# EAGLE board Rocket-Control3 (EAGLE 7.6.0)
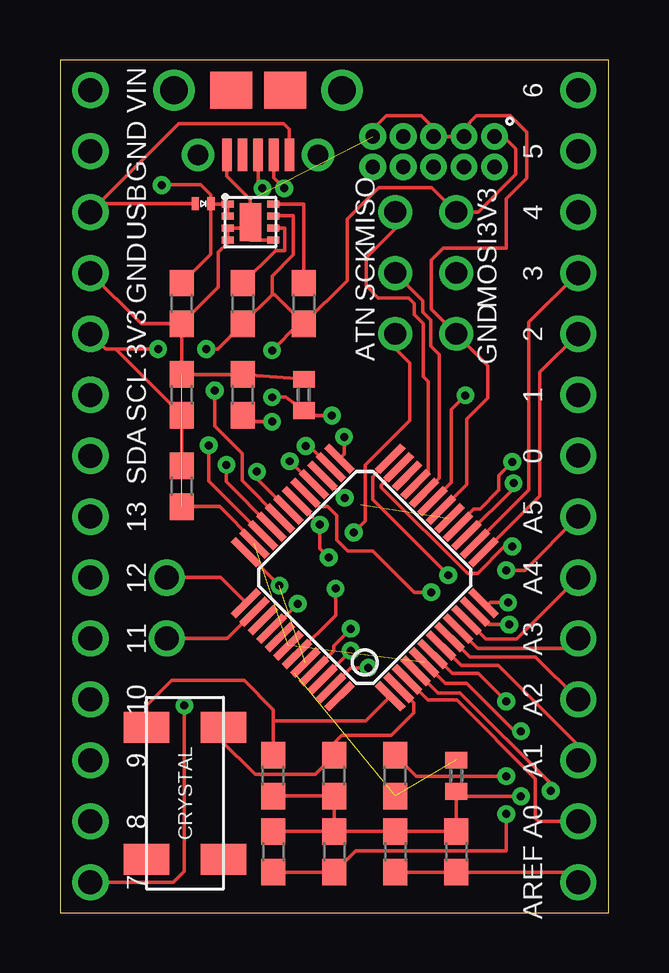
[diagram p0: board, top side]
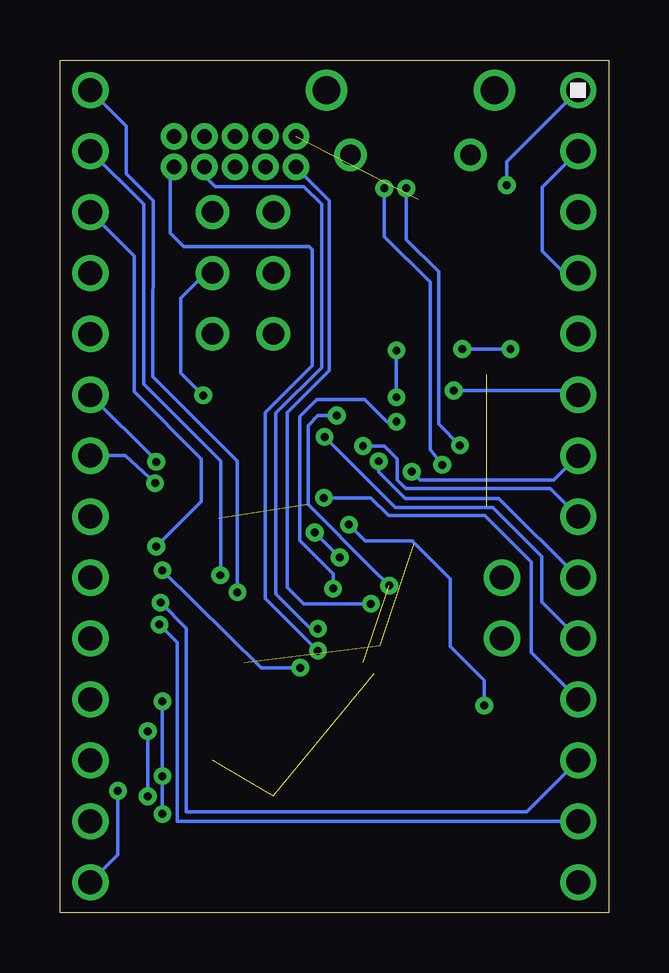
[diagram p1: board, bottom side, seen from below]

Size 22.86 x 35.55 mm. Coordinates in mm from the lower left corner, seen from the top.
Outline: 0,0 22.86,0 22.86,35.55 0,35.55 0,0
Copper layers (1*16): Top 0.035mm / dielectric 1.5mm / Bottom 0.035mm
Design rules "pcbway": minimum track width 6mil, minimum drill 12mil, track to track 6mil, track to pad 6mil, pad to pad 6mil, via to via 6mil, smd to smd 6mil, copper to edge 6mil, drill to drill 6mil, minimum pad ring 10mil, minimum via ring 8mil, stop-mask expansion 4mil, vias tented up to drill 0mil, thermal gap 10mil

## Footprints (pad centres in the part's own frame; a part is rotated, then mirrored left to right if it is on the bottom)
TQFP48 = smd 0.3 x 1.5: 1 -2.75,-4.25; 2 -2.25,-4.25; 3 -1.75,-4.25; 4 -1.25,-4.25; 5 -0.75,-4.25; 6 -0.25,-4.25; 7 0.25,-4.25; 8 0.75,-4.25; 9 1.25,-4.25; 10 1.75,-4.25; 11 2.25,-4.25; 12 2.75,-4.25; 25 2.75,4.25; 26 2.25,4.25; 27 1.75,4.25; 28 1.25,4.25; 29 0.75,4.25; 30 0.25,4.25; 31 -0.25,4.25; 32 -0.75,4.25; 33 -1.25,4.25; 34 -1.75,4.25; 35 -2.25,4.25; 36 -2.75,4.25 | smd 1.5 x 0.3: 13 4.25,-2.75; 14 4.25,-2.25; 15 4.25,-1.75; 16 4.25,-1.25; 17 4.25,-0.75; 18 4.25,-0.25; 19 4.25,0.25; 20 4.25,0.75; 21 4.25,1.25; 22 4.25,1.75; 23 4.25,2.25; 24 4.25,2.75; 37 -4.25,2.75; 38 -4.25,2.25; 39 -4.25,1.75; 40 -4.25,1.25; 41 -4.25,0.75; 42 -4.25,0.25; 43 -4.25,-0.25; 44 -4.25,-0.75; 45 -4.25,-1.25; 46 -4.25,-1.75; 47 -4.25,-2.25; 48 -4.25,-2.75
C0603 = smd 1.1 x 1: 1 -0.85,0; 2 0.85,0
4-SOJ:CRYSTAL = smd 1.3 x 1.9: 1:CRYSTAL -2.75,1.6; 2:CRYSTAL -2.75,-1.6; 3:N/C 2.75,1.6; 4:N/C 2.75,-1.6
8-WFDFN-EXPOSED-PAD = smd 0.28 x 0.5: AGND 1.5,0; EN 1,0; FB 1.5,1.9; PG 0,1.9; PGND 0,0; SW 0.5,1.9; VIN 0.5,0; VOS 1,1.9 | smd 1.6 x 0.9: EXPOSED-THERMAL-PAD 0.75,0.95
SOD-882 = smd 0.3 x 0.55: P$1 0,0; P$2 0.65,0
HEADER-HOLE = drill 1: P$1 0,0
HEADER-SIDE-A = drill 1: A0 0,-12.7; A1 0,-10.16; A2 0,-7.62; A3 0,-5.08; A4 0,-2.54; A5 0,0; AREF 0,-15.24; D0 0,2.54; D1 0,5.08; D2 0,7.62; D3 0,10.16; D4 0,12.7; D5 0,15.24; D6 0,17.78
HEADER-SIDE-B = drill 1: 3V3 -12.7,0; D7 -35.56,0; D8 -33.02,0; D9 -30.48,0; D10 -27.94,0; D11 -25.4,0; D12 -22.86,0; D13 -20.32,0; GND-IN -5.08,0; GND-OUT -10.16,0; SCL -15.24,0; SDA -17.78,0; USB -7.62,0; VIN -2.54,0
C0402 = smd 0.7 x 0.9: 1 -0.65,0; 2 0.65,0
10118194-0001LF:MICRO-USB-B = smd 1.35 x 0.4: 1:VBUS 2.7,1.3; 2:D- 2.7,0.65; 3:D+ 2.7,0; 4:ID 2.7,-0.65; 5:GND 2.7,-1.3 | drill 0.85: NC1 2.7,2.5; NC6 2.7,-2.5 | drill 1.15: NC2 0,3.5; NC5 0,-3.5 | smd 1.55 x 1.75: NC3 0,1.125; NC4 0,-1.125
SPI-PORT = drill 0.9: ATN 0,0; GND 2.54,0; MISO 0,5.08; MOSI 2.54,2.54; SCK 0,2.54; VIN 2.54,5.08
JTAG-MINI = drill 0.6: GND-1 0.635,4.445; GND-2 0.635,3.175; GND-3 0.635,0.635; JTAG09 1.905,4.445; JTAG10 1.905,5.715; NC-1 0.635,1.905; NC-2 1.905,1.905; NC-3 1.905,3.175; RESET 1.905,0.635; VIN 0.635,5.715

## Placement (x,y rotation side)
U$1  ATSAML21G18B-AUT  [TQFP48]  12.7,13.97 45 top
U$2  CRYSTAL-CAPACITORS  [C0603]  8.89,5.71 90 top
U$3  CRYSTAL-CAPACITORS  [C0603]  11.43,5.71 90 top
U$4  CRYSTAL  [4-SOJ:CRYSTAL]  5.21,4.98 270 top
U$5  REGULATOR  [8-WFDFN-EXPOSED-PAD]  6.99,29.54 270 top
U$6  AREF-CAPACITORS  [C0603]  13.97,2.54 270 top
U$7  AREF-CAPACITORS  [C0603]  16.51,2.54 270 top
U$8  ANALOG-CAPACITORS  [C0603]  8.89,2.54 270 top
U$9  ANALOG-CAPACITORS  [C0603]  11.43,2.54 270 top
U$10  ANALOG-INDUCTOR  [C0603]  13.97,5.71 90 top
U$11  REGULATOR-CAPACITORS  [C0603]  5.08,25.4 90 top
U$12  REGULATOR-CAPACITORS  [C0603]  5.08,17.78 90 top
U$13  REGULATOR-INDUCTOR  [C0603]  10.16,25.4 270 top
U$14  REGULATOR-RESISTOR  [C0603]  7.62,25.4 270 top
U$15  REGULATION-DIODE  [SOD-882]  5.64,29.57 0 top
U$16  HEADER-HOLE  [HEADER-HOLE]  4.45,13.97 0 top
U$17  HEADER-HOLE  [HEADER-HOLE]  4.45,11.43 0 top
U$21  HEADER-SIDE-A  [HEADER-SIDE-A]  21.59,16.51 0 top
U$22  HEADER-SIDE-B  [HEADER-SIDE-B]  1.27,36.83 90 top
U$26  VDDIO-CAPACITOR  [C0402]  16.51,5.71 90 top
U$35  VDDIO-CAPACITOR  [C0402]  10.16,21.59 270 top
U$38  10118194-0001LF:MICRO-USB  [10118194-0001LF:MICRO-USB-B]  8.26,34.29 270 top
U$41  SPI-PORT  [SPI-PORT]  13.97,24.13 0 top
U$56  VDDCORE-CAPACITOR  [C0603]  7.62,21.59 90 top
U$57  VIN-CAPACITOR  [C0603]  5.08,21.59 90 top
U$61  JTAG-MINI  [JTAG-MINI]  12.4,32.99 270 top

## Library data of the parts
U$1-U$17 U$21 U$22 U$26 U$35 U$38 U$41 U$56 U$57 U$61 = RocketControlBoard

## Nets
+3V3: U$1.17 U$1.36 U$1.44 U$5.SW U$10.1 U$12.2 U$13.2 U$14.2 U$22.3V3 U$26.2 U$35.2 U$41.VIN U$57.1 U$61.VIN
A0: U$1.3 U$21.A0
A1: U$1.7 U$21.A1
A2: U$1.8 U$21.A2
A3: U$1.9 U$21.A3
A4: U$1.10 U$21.A4
A5: U$1.47 U$21.A5
ANALOG-VDD: U$1.6 U$8.2 U$9.2 U$10.2
AREF: U$1.4 U$6.2 U$7.2 U$21.AREF
CRYSTAL-A: U$1.1 U$2.2 U$4.2:CRYSTAL
CRYSTAL-B: U$1.2 U$3.2 U$4.1:CRYSTAL
D0-TX: U$1.15 U$21.D0
D1-RX: U$1.16 U$21.D1
D2: U$1.13 U$21.D2
D3: U$1.14 U$21.D3
D4: U$1.23 U$21.D4
D5: U$1.24 U$21.D5
D6: U$1.29 U$21.D6
D7: U$1.30 U$22.D7 U$41.ATN
D8: U$1.11 U$22.D8
D9: U$1.12 U$22.D9
D10: U$1.27 U$22.D10
D11: U$1.25 U$22.D11
D12: U$1.28 U$22.D12
D13: U$1.26 U$22.D13
GND: U$1.5 U$1.18 U$1.35 U$1.42 U$2.1 U$3.1 U$5.AGND U$5.EN U$5.EXPOSED-THERMAL-PAD U$5.FB U$6.1 U$7.1 U$8.1 U$9.1 U$11.1 U$12.1 U$22.GND-IN U$22.GND-OUT U$26.1 U$35.1 U$38.5:GND U$41.GND U$56.2 U$57.2 U$61.GND-1 U$61.GND-2 U$61.GND-3
MISO: U$1.21 U$41.MISO
MOSI: U$1.19 U$41.MOSI
N$1: U$5.PG U$13.1
N$3: U$5.VOS U$14.1
RX: U$1.38 U$17.P$1
SCK: U$1.20 U$41.SCK
SCL: U$1.32 U$22.SCL
SDA: U$1.31 U$22.SDA
SWD-06(RESET): U$1.40 U$61.RESET
SWD-09: U$1.45 U$61.JTAG09
SWD-10: U$1.46 U$61.JTAG10
TX: U$1.37 U$16.P$1
USB: U$15.P$1 U$22.USB U$38.1:VBUS
USB-N: U$1.33 U$38.2:D-
USB-P: U$1.34 U$38.3:D+
VDDCORE: U$1.43 U$56.1
VIN: U$5.PGND U$5.VIN U$11.2 U$15.P$2 U$22.VIN

## Tracks (layer width: path | path; a pad name or v marks a point on that pad's centre or on a via)
+3V3  (via drill 0.33)  (4 unrouted)
  Top 0.152: U$12.2 U$57.1 2.33,23.5 | U$5.SW 8.88,29.06 9.73,29.06 9.73,27.43 8.84,26.54 8.84,25.77 | 8.84,25.77 U$14.2 6.57,23.5 v6.1,23.5 | 8.84,25.77 8.94,25.77 U$13.2 | v4.09,23.5 2.33,23.5 | U$22.3V3 1.91,23.5 2.33,23.5 | U$1.44 9.77,9.98 | U$13.2 11.96,26.35 11.96,28.91 13.28,30.23 15.49,30.23 U$41.VIN 17.42,29.21 19,30.79 19,31.85 18.49,32.36 U$61.VIN | U$1.36 8.46,14.33 v9.14,13.64 | v8.84,23.44 9.95,24.55 U$13.2 | v8.84,21.49 9.41,21.49 U$35.2 10.17,20.73 v11.33,20.73
  Bottom 0.152: v6.1,23.5 v4.09,23.5 | v9.14,13.64 9.86,14.33 12.52,17.02 12.52,20.32 12.12,20.73 v11.33,20.73 | v8.84,21.49 v8.84,23.44
A0
  Top 0.152: U$1.3 15.33,8.87 16.54,8.87 19.81,5.59 19.81,3.94 19.94,3.81 U$21.A0
A1
  Top 0.152: U$1.7 16.71,10.31 18.26,10.31 21.59,6.99 U$21.A1
A2
  Top 0.152: U$1.8 17.06,10.67 19.81,10.67 U$21.A2
A3
  Top 0.152: U$1.9 17.41,11.02 21.18,11.02 U$21.A3
A4
  Top 0.152: U$1.10 17.74,11.4 19.02,11.4 U$21.A4
A5  (via drill 0.33)
  Top 0.152: U$21.A5 19.36,14.28 v18.59,14.28 | v12.85,10.21 12.12,10.21 U$1.47
  Bottom 0.152: v18.59,14.28 14.48,10.21 v12.85,10.21
ANALOG-VDD  (via drill 0.33)
  Top 0.152: U$1.6 16.33,9.98 17.42,9.98 v18.59,8.81 | v18.59,5.69 14.85,5.69 U$10.2 | U$8.2 U$9.2 12.33,2.59 18.59,2.59 v18.59,4.12
  Bottom 0.152: v18.59,8.81 v18.59,5.69 v18.59,4.12
AREF  (via drill 0.33)
  Top 0.152: U$1.4 15.73,9.17 16.66,9.17 20.45,5.38 v20.45,5.08 | U$21.AREF 21.17,1.69 U$7.2 U$6.2
  Bottom 0.152: v20.45,5.08 20.45,2.41 U$21.AREF
CRYSTAL-A
  Top 0.152: 8.89,8 8.89,8.46 7.67,9.68 4.65,9.68 3.61,8.64 U$4.2:CRYSTAL | 8.89,8 U$2.2 | U$1.1 12.74,8 8.89,8
CRYSTAL-B
  Top 0.152: U$1.2 14.73,8.76 14.73,8.33 13.79,7.39 11.73,7.39 11.43,7.09 U$3.2 10.63,5.77 8.13,5.77 6.68,7.21 U$4.1:CRYSTAL
D0-TX  (via drill 0.33)
  Top 0.152: U$1.15 18.9,17.69 v18.9,17.91
  Bottom 0.152: U$21.D0 20.14,19.05 v18.9,17.91
D1-RX  (via drill 0.33)
  Top 0.152: v18.85,18.8 18.29,18.24 18.29,17.63 17.5,16.84 17.25,16.84 16.76,16.36 16.76,16.27 U$1.16
  Bottom 0.152: U$21.D1 18.85,18.85 v18.85,18.8
D2
  Top 0.152: U$1.13 19.99,17.37 19.99,22.53 U$21.D2
D3
  Top 0.152: U$1.14 19.53,17.62 19.53,24.61 U$21.D3
D4  (via drill 0.33)
  Top 0.152: U$1.23 13.39,17.84 13.39,17.73 16.99,14.15 17.4,14.15 18.52,15.27 v18.85,15.27
  Bottom 0.152: U$21.D4 19.76,27.38 19.76,21.72 16.97,18.92 16.97,17.14 v18.85,15.27 18.8,15.27
D5  (via drill 0.33)
  Top 0.152: v16.18,14.07 13.03,17.22 13.03,18.16 13.76,18.89 U$1.24
  Bottom 0.152: U$21.D5 19.38,29.54 19.38,22.05 16.15,18.82 16.15,14.1 v16.18,14.07
D6  (via drill 0.33)
  Top 0.152: U$1.29 10.79,16.94 11.15,16.94 11.53,16.56 11.53,15.54 11.99,15.09 13.03,15.09 14.76,13.36 v15.47,13.36
  Bottom 0.152: U$21.D6 20.09,32.79 20.09,30.81 18.97,29.69 19,22.35 15.47,18.82 v15.47,13.36
D7  (via drill 0.33)
  Top 0.152: U$1.30 v10.82,16.18 10.82,15.19 v11.2,14.81 | U$22.D7 4.72,1.27 5.18,1.73 v5.18,8.64 | U$41.ATN 13.97,23.52 14.58,22.91 14.58,20.52 12.72,18.67 12.72,16.33 v12.24,15.85
  Bottom 0.152: v10.82,16.18 10.14,15.49 8.18,15.49 6.6,13.92 6.6,11.1 5.18,9.68 v5.18,8.64 | v12.24,15.85 v11.2,14.81
D8  (via drill 0.33)
  Top 0.152: U$1.11 17.84,12.01 v18.72,12.01
  Bottom 0.152: U$22.D8 17.98,3.81 17.98,11.28 v18.72,12.01
D9  (via drill 0.33)
  Top 0.152: U$1.12 17.78,12.78 17.93,12.93 v18.67,12.93
  Bottom 0.152: v18.67,12.93 17.6,11.86 17.6,4.22 3.4,4.22 U$22.D9
D10  (via drill 0.33)
  Top 0.152: v11.86,17.3 U$1.27
  Bottom 0.152: U$22.D10 3.23,10.85 3.23,14.63 5.16,16.56 9.17,16.56 9.91,17.3 v11.86,17.3
D11  (via drill 0.33)
  Top 0.152: U$1.25 11.84,19.12 v11.84,19.84
  Bottom 0.152: U$22.D11 2.79,12.95 2.79,14.86 4.83,16.89 8.89,16.89 v11.84,19.84
D12  (via drill 0.33)
  Top 0.152: U$1.28 10.54,17.86 v9.58,18.82
  Bottom 0.152: v9.58,18.82 9.58,18.36 8.48,17.27 4.57,17.27 U$22.D12
D13  (via drill 0.33)
  Top 0.152: v10.24,19.46 10.4,19.46 U$1.26
  Bottom 0.152: v10.24,19.46 9.35,19.46 8.81,18.92 8.81,18.03 8.46,17.68 2.44,17.68 U$22.D13
GND  (via drill 0.33)  (4 unrouted)
  Top 0.152: U$8.1 U$9.1 | U$9.1 U$6.1 U$7.1 U$26.1 16.52,4.85 v19.2,4.85 | U$2.1 U$3.1 U$9.1 | U$1.5 16.06,9.55 16.94,9.55 18.95,7.57 v19.2,7.57 | U$35.1 U$56.2 U$57.2 U$11.1 | U$22.GND-OUT 3.39,24.55 U$11.1 | U$5.EXPOSED-THERMAL-PAD 7.68,28.54 U$5.EN U$5.AGND 6.99,27.91 6.6,27.53 6.6,26.07 U$11.1 | U$5.FB 7.93,28.04 U$5.EXPOSED-THERMAL-PAD | U$38.5:GND 6.96,30.71 7.93,29.73 U$5.EXPOSED-THERMAL-PAD | U$1.35 8.1,15.48 6.66,16.93 U$12.1 | U$1.18 16.94,17.86 16.94,20.57 17.83,21.46 17.83,22.81 U$41.GND 15.47,25.17 15.47,27.2 15.98,27.71 18.59,27.71 18.59,29.77 19.46,30.63 19.46,32.54 18.77,33.22 17.35,33.22 16.84,32.72 U$61.GND-1 U$61.GND-2 15.57,32.72 15.06,33.22 13.59,33.22 13.03,32.66 U$61.GND-3
  Bottom 0.152: v19.2,7.57 v19.2,4.85 | U$22.GND-IN 2.77,30.25 2.77,27.58 1.85,26.67 U$22.GND-OUT
MISO
  Top 0.152: U$1.21 15.34,18.38 15.34,22.15 15.14,22.35 15.14,24.56 14.76,24.94 14.76,25.4 14.53,25.63 13.26,25.63 12.75,26.14 12.75,27.3 13.97,28.52 U$41.MISO
MOSI  (via drill 0.33)
  Top 0.152: U$1.19 16.31,17.93 16.31,20.98 v16.89,21.57
  Bottom 0.152: v16.89,21.57 17.83,22.5 17.83,25.63 16.79,26.67 U$41.MOSI
N$1
  Top 0.152: U$13.1 10.16,29.54 U$5.PG
N$3
  Top 0.152: U$14.1 8.98,27.61 9.37,27.61 9.37,28.54 U$5.VOS
RX
  Top 0.152: U$1.38 6.98,11.43 U$17.P$1
SCK
  Top 0.152: U$1.20 15.8,18.13 15.8,23.27 15.44,23.62 15.44,24.71 15.11,25.04 15.11,25.53 U$41.SCK
SCL  (via drill 0.33)
  Top 0.152: U$1.32 7.59,18.02 7.59,19.15 6.45,20.3 v6.45,21.77
  Bottom 0.152: v6.45,21.77 1.45,21.77 U$22.SCL
SDA  (via drill 0.33)
  Top 0.152: U$1.31 8.2,18.11 v8.2,18.39
  Bottom 0.152: v8.2,18.39 7.85,18.03 2.29,18.03 U$22.SDA
SWD-06(RESET)  (via drill 0.33)
  Top 0.152: v9.91,12.88 8.88,11.85 U$1.40
  Bottom 0.152: v9.91,12.88 12.7,12.88 13.39,13.56 13.39,20.85 11.63,22.61 11.63,29.69 U$61.RESET
SWD-09  (via drill 0.33)
  Top 0.152: 10.62,10.24 10.62,10.12 U$1.45 10.58,10.1 11.4,10.92 11.4,11.12 v12.12,11.84
  Bottom 0.152: v12.12,11.84 12.42,11.84 13.87,13.28 13.87,20.83 11.96,22.73 11.96,29.54 12.7,30.28 16.38,30.28 16.84,30.73 U$61.JTAG09
SWD-10  (via drill 0.33)
  Top 0.152: v12.12,10.92 v12.12,10.91 U$1.46
  Bottom 0.152: v12.12,10.92 14.3,13.11 14.3,20.85 12.34,22.81 12.34,27.64 12.47,27.76 17.7,27.76 18.26,28.32 18.26,30.94 U$61.JTAG10
TX
  Top 0.152: U$16.P$1 6.69,13.97 U$1.37
USB
  Top 0.152: U$15.P$1 1.63,29.57 U$22.USB 4.95,32.89 9.32,32.89 9.55,32.66 U$38.1:VBUS
USB-N  (via drill 0.33)
  Top 0.152: v6.93,18.67 6.93,17.97 U$1.33 | U$38.2:D- 8.9,30.64 v9.35,30.2
  Bottom 0.152: v6.93,18.67 7.44,19.3 7.44,26.29 9.35,28.19 v9.35,30.2
USB-P  (via drill 0.33)
  Top 0.152: v6.2,19.48 6.2,18 U$1.34 | v8.43,30.2 8.26,30.38 U$38.3:D+
  Bottom 0.152: v8.43,30.2 8.43,28.07 7.09,26.72 7.09,20.37 v6.2,19.48
VDDCORE  (via drill 0.33)
  Top 0.152: 7.59,20.8 7.62,20.78 U$56.1 7.89,20.47 v8.84,20.47 | 9.77,10.79 U$1.43 11.48,12.4 v11.48,13.51
  Bottom 0.152: v11.48,13.51 11.48,14.12 12.88,15.52 12.88,20.68 12.17,21.39 10.16,21.39 9.25,20.47 v8.84,20.47
VIN  (via drill 0.33)
  Top 0.152: U$15.P$2 6.29,29.93 5.87,30.35 5.51,30.35 5.21,30.35 4.27,30.35 v4.24,30.33 | U$15.P$2 6.31,29.54 U$5.PGND U$5.VIN | U$11.2 6.29,27.46 U$15.P$2
  Bottom 0.152: U$22.VIN 4.24,31.32 v4.24,30.33